# EAGLE board final-schematic (EAGLE 8.4.0)
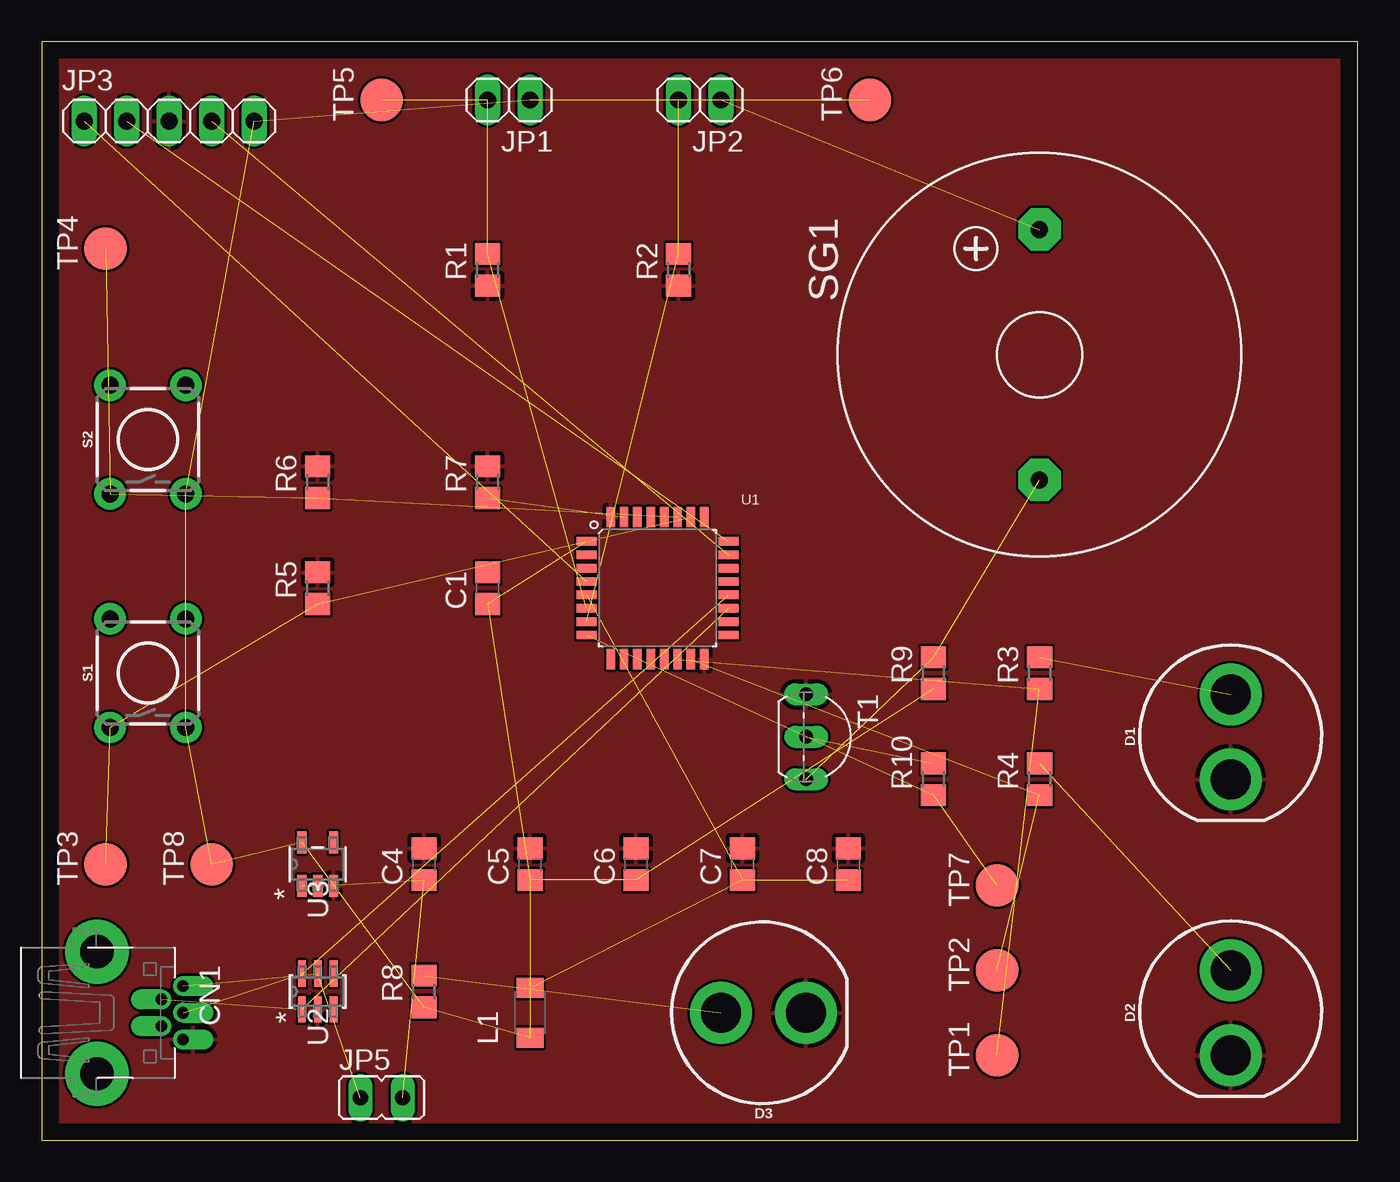
[diagram p0: board, top side]
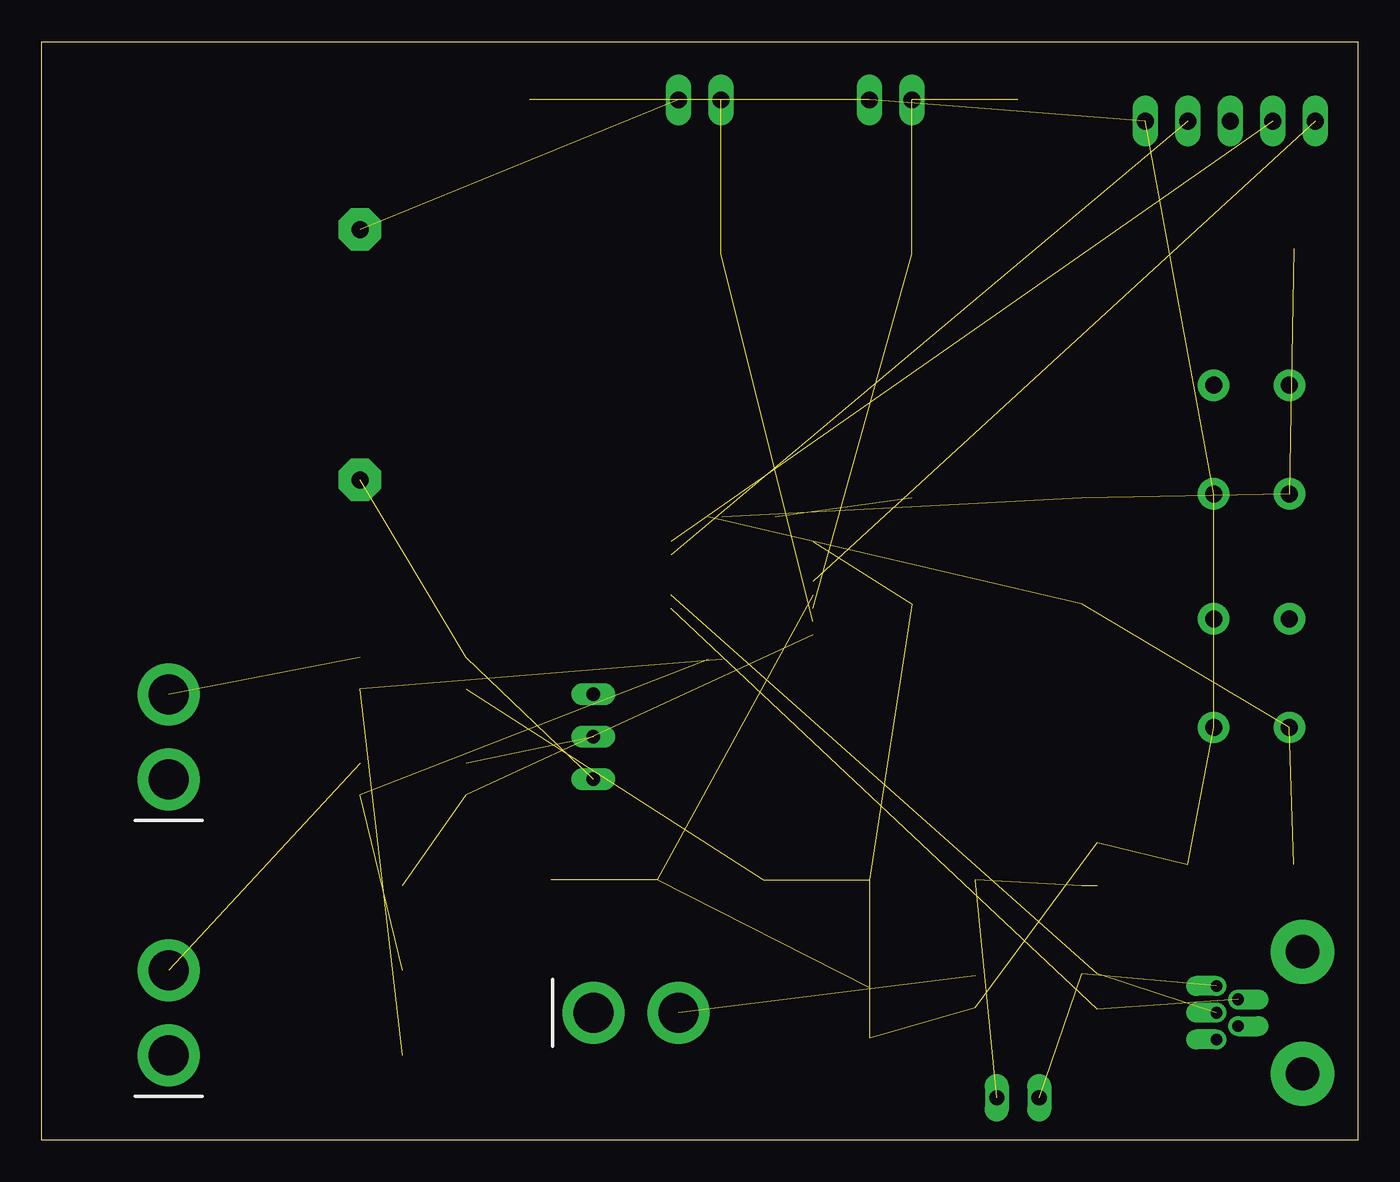
[diagram p1: board, bottom side, seen from below]

Size 78.72 x 65.71 mm. Coordinates in mm from the lower left corner, seen from the top.
Outline: 0,0 78.72,0 78.72,65.71 0,65.71 0,0
Copper layers (1*16): Top 0.035mm / dielectric 1.5mm / Bottom 0.035mm
Design rules "default": minimum track width 6mil, minimum drill 0.35mm, track to track 6mil, track to pad 6mil, pad to pad 6mil, via to via 6mil, smd to smd 6mil, copper to edge 40mil, drill to drill 6mil, minimum pad ring 10mil, minimum via ring 8mil, stop-mask expansion 4mil, vias tented up to drill 0mil, thermal gap 10mil

## Footprints (pad centres in the part's own frame; a part is rotated, then mirrored left to right if it is on the bottom)
C0805 = smd 1.3 x 1.5: 1 -0.95,0; 2 0.95,0
USB-MINIB-THM-MOLEX = drill 0.7 offset: D+ 0,9.72; D- -0.8,8.42; GND 1.6,9.72; ID 0.8,8.42; VBUS -1.6,9.72 | drill 2 pad 3.81: GND1 -3.65,4.57; GND4 3.65,4.57
LED_10MM = drill 2.4 pad 3.7: A 2.54,0; C -2.54,0
1X02 = drill 1.016 long: 1 -1.27,0; 2 1.27,0
1X05 = drill 1.016 long: 1 -5.08,0; 2 -2.54,0; 3 0,0; 4 2.54,0; 5 5.08,0
JP1 = drill 0.914 long: 1 0,-1.27; 2 0,1.27
L3216C = smd 1.2 x 1.6: 1 -1.5,0; 2 1.5,0
R0805 = smd 1.3 x 1.5: 1 -0.95,0; 2 0.95,0
TACTILE_SWITCH_PTH_6.0MM = drill 1.016 pad 1.88: 1 -3.251,2.261; 2 3.251,2.261; 3 -3.251,-2.261; 4 3.251,-2.261
F/CM04P = drill 1.016 pad 2.54 octagon: + 7.493,0; - -7.493,0
TO92-EBC-OVAL = drill 0.813 long: B 0,-1.27; C 2.54,-1.27; E -2.54,-1.27
B2,54 = smd 2.54 x 2.54: TP 0,0
QFP32-7X7 = smd 1.2 x 0.5: 1 -4.25,2.8; 2 -4.25,2; 3 -4.25,1.2; 4 -4.25,0.4; 5 -4.25,-0.4; 6 -4.25,-1.2; 7 -4.25,-2; 8 -4.25,-2.8; 17 4.25,-2.8; 18 4.25,-2; 19 4.25,-1.2; 20 4.25,-0.4; 21 4.25,0.4; 22 4.25,1.2; 23 4.25,2; 24 4.25,2.8 | smd 0.5 x 1.2: 9 -2.8,-4.25; 10 -2,-4.25; 11 -1.2,-4.25; 12 -0.4,-4.25; 13 0.4,-4.25; 14 1.2,-4.25; 15 2,-4.25; 16 2.8,-4.25; 25 2.8,4.25; 26 2,4.25; 27 1.2,4.25; 28 0.4,4.25; 29 -0.4,4.25; 30 -1.2,4.25; 31 -2,4.25; 32 -2.8,4.25
SOT457 = smd 1.575 x 0.457: 1 -1.067,0.95; 2 -1.067,0; 3 -1.067,-0.95; 4 1.067,-0.95; 5 1.067,0; 6 1.067,0.95
SOT-23-5_MC = smd 1.321 x 0.559: 1 -1.295,0.95; 2 -1.295,0; 3 -1.295,-0.95; 4 1.295,-0.95; 5 1.295,0.95

## Placement (x,y rotation side)
C1  100n  [C0805]  26.67,33.02 90 top
C4  10uf  [C0805]  22.86,16.51 90 top
C5  10uf  [C0805]  29.21,16.51 90 top
C6  0.1uf  [C0805]  35.56,16.51 90 top
C7  10uf  [C0805]  41.91,16.51 90 top
C8  0.1uf  [C0805]  48.26,16.51 90 top
CN1  [USB-MINIB-THM-MOLEX]  -1.27,7.62 270 top
D1  [LED_10MM]  71.12,24.13 90 top
D2  [LED_10MM]  71.12,7.62 90 top
D3  [LED_10MM]  43.18,7.62 180 top
JP1  [1X02]  27.94,62.23 180 top
JP2  [1X02]  39.37,62.23 180 top
JP3  [1X05]  7.62,60.96 0 top
JP5  [JP1]  20.32,2.54 270 top
L1  2k5 50mA  [L3216C]  29.21,7.62 90 top
R1  6k  [R0805]  26.67,52.07 90 top
R2  6k  [R0805]  38.1,52.07 90 top
R3  330  [R0805]  59.69,27.94 90 top
R4  330  [R0805]  59.69,21.59 90 top
R5  10k  [R0805]  16.51,33.02 90 top
R6  10k  [R0805]  16.51,39.37 90 top
R7  10k  [R0805]  26.67,39.37 90 top
R8  10k  [R0805]  22.86,8.89 90 top
R9  10k  [R0805]  53.34,27.94 90 top
R10  10k  [R0805]  53.34,21.59 90 top
S1  SPST  [TACTILE_SWITCH_PTH_6.0MM]  6.35,27.94 90 top
S2  SPST  [TACTILE_SWITCH_PTH_6.0MM]  6.35,41.91 90 top
SG1  F/CM04P  [F/CM04P]  59.69,46.99 90 top
T1  2N2222  [TO92-EBC-OVAL]  46.99,24.13 270 top
TP1  TPB2,54  [B2,54]  57.15,5.08 90 top
TP2  TPB2,54  [B2,54]  57.15,10.16 90 top
TP3  TPB2,54  [B2,54]  3.81,16.51 90 top
TP4  TPB2,54  [B2,54]  3.81,53.34 90 top
TP5  TPB2,54  [B2,54]  20.32,62.23 90 top
TP6  TPB2,54  [B2,54]  49.53,62.23 90 top
TP7  TPB2,54  [B2,54]  57.15,15.24 90 top
TP8  TPB2,54  [B2,54]  10.16,16.51 90 top
U1  STM32F042K6  [QFP32-7X7]  36.83,33.02 0 top
U2  IP4220CZ6  [SOT457]  16.51,8.89 90 top
U3  MCP1802T-3302I/OT  [SOT-23-5_MC]  16.51,16.51 90 top

## Library data of the parts
C1 C4-C8 L1 R1-R10 = rcl
CN1 T1 = adafruit
D1-D3 = SparkFun-LED
JP1-JP3 = pinhead
JP5 = jumper
S1 S2 = SparkFun-Switches; PROD_ID: SWCH-08441; SF_SKU: COM-00097
SG1 = buzzer; OC_FARNELL: unknown; OC_NEWARK: unknown
TP1-TP8 = testpad
U1 = STM32F042K
U2 = IP4220CZ6; MANUFACTURER_PART_NUMBER: IP4220CZ6; VENDOR: NXP
U3 = MCP1802T; MANUFACTURER_PART_NUMBER: MCP1802T3302IOT; VENDOR: Microchip

## Nets
3.3V: C1.1 C5.1 C6.1 JP1.1 JP2.1 JP3.5 L1.1 R8.1 R9.1 S1.3 S2.3 SG1.+ TP8.TP U1.1 U3.5
+5V: C4.1 JP5.2 U3.1 U3.2
AVDD: C7.1 C8.1 L1.2 U1.5
BOOT0: R7.1 U1.31
BUT1: R5.1 S1.1 TP3.TP U1.26
BUT2: R6.1 S2.1 TP4.TP U1.27
BUZ: R10.1 TP7.TP U1.8
GND: C4.2 C5.2 C6.2 C7.2 C8.2 CN1.GND D1.C D2.C D3.C JP3.3 R1.1 R2.1 R5.2 R6.2 R7.2 T1.E U1.16 U1.32 U2.2 U3.3
N$1: JP1.2 R1.2 TP5.TP U1.6
N$2: JP2.2 R2.2 TP6.TP U1.7
N$3: R3.1 TP1.TP U1.14
N$4: R4.1 TP2.TP U1.15
N$5: D1.A R3.2
N$6: D2.A R4.2
N$7: R9.2 SG1.- T1.C
N$8: R10.2 T1.B
N$9: D3.A R8.2
N$11: C1.2
NRST: JP3.1 U1.4
SWCLK: JP3.2 U1.24
SWDIO: JP3.4 U1.23
USBM: CN1.D+ U1.20 U2.6
USBP: CN1.D- U1.19 U2.1
VBUS: CN1.VBUS JP5.1 U2.5
VDDIO2: U1.17

## Tracks (layer width: path | path; a pad name or v marks a point on that pad's centre or on a via)
3.3V  (14 unrouted)
+5V  (3 unrouted)
AVDD  (3 unrouted)
BOOT0  (1 unrouted)
BUT1  (3 unrouted)
BUT2  (3 unrouted)
BUZ  (2 unrouted)
GND
  pour Top: -1.27,67.31 -1.27,-1.27 80.01,-1.27 80.01,67.31
N$1  (3 unrouted)
N$2  (3 unrouted)
N$3  (2 unrouted)
N$4  (2 unrouted)
N$5  (1 unrouted)
N$6  (1 unrouted)
N$7  (2 unrouted)
N$8  (1 unrouted)
N$9  (1 unrouted)
NRST  (1 unrouted)
SWCLK  (1 unrouted)
SWDIO  (1 unrouted)
USBM  (2 unrouted)
USBP  (2 unrouted)
VBUS  (2 unrouted)